# Altium PCB RasPagerC9000_smart_prototyping.PcbDoc
Units mm, origin at the board's own origin, x right, y up, seen from the top; angles counter-clockwise.
Board outline 40.39 x 44.45 mm, 2 copper layers (Top Layer, Bottom Layer); 31 components, 33 nets, 123 pads, 25 vias.
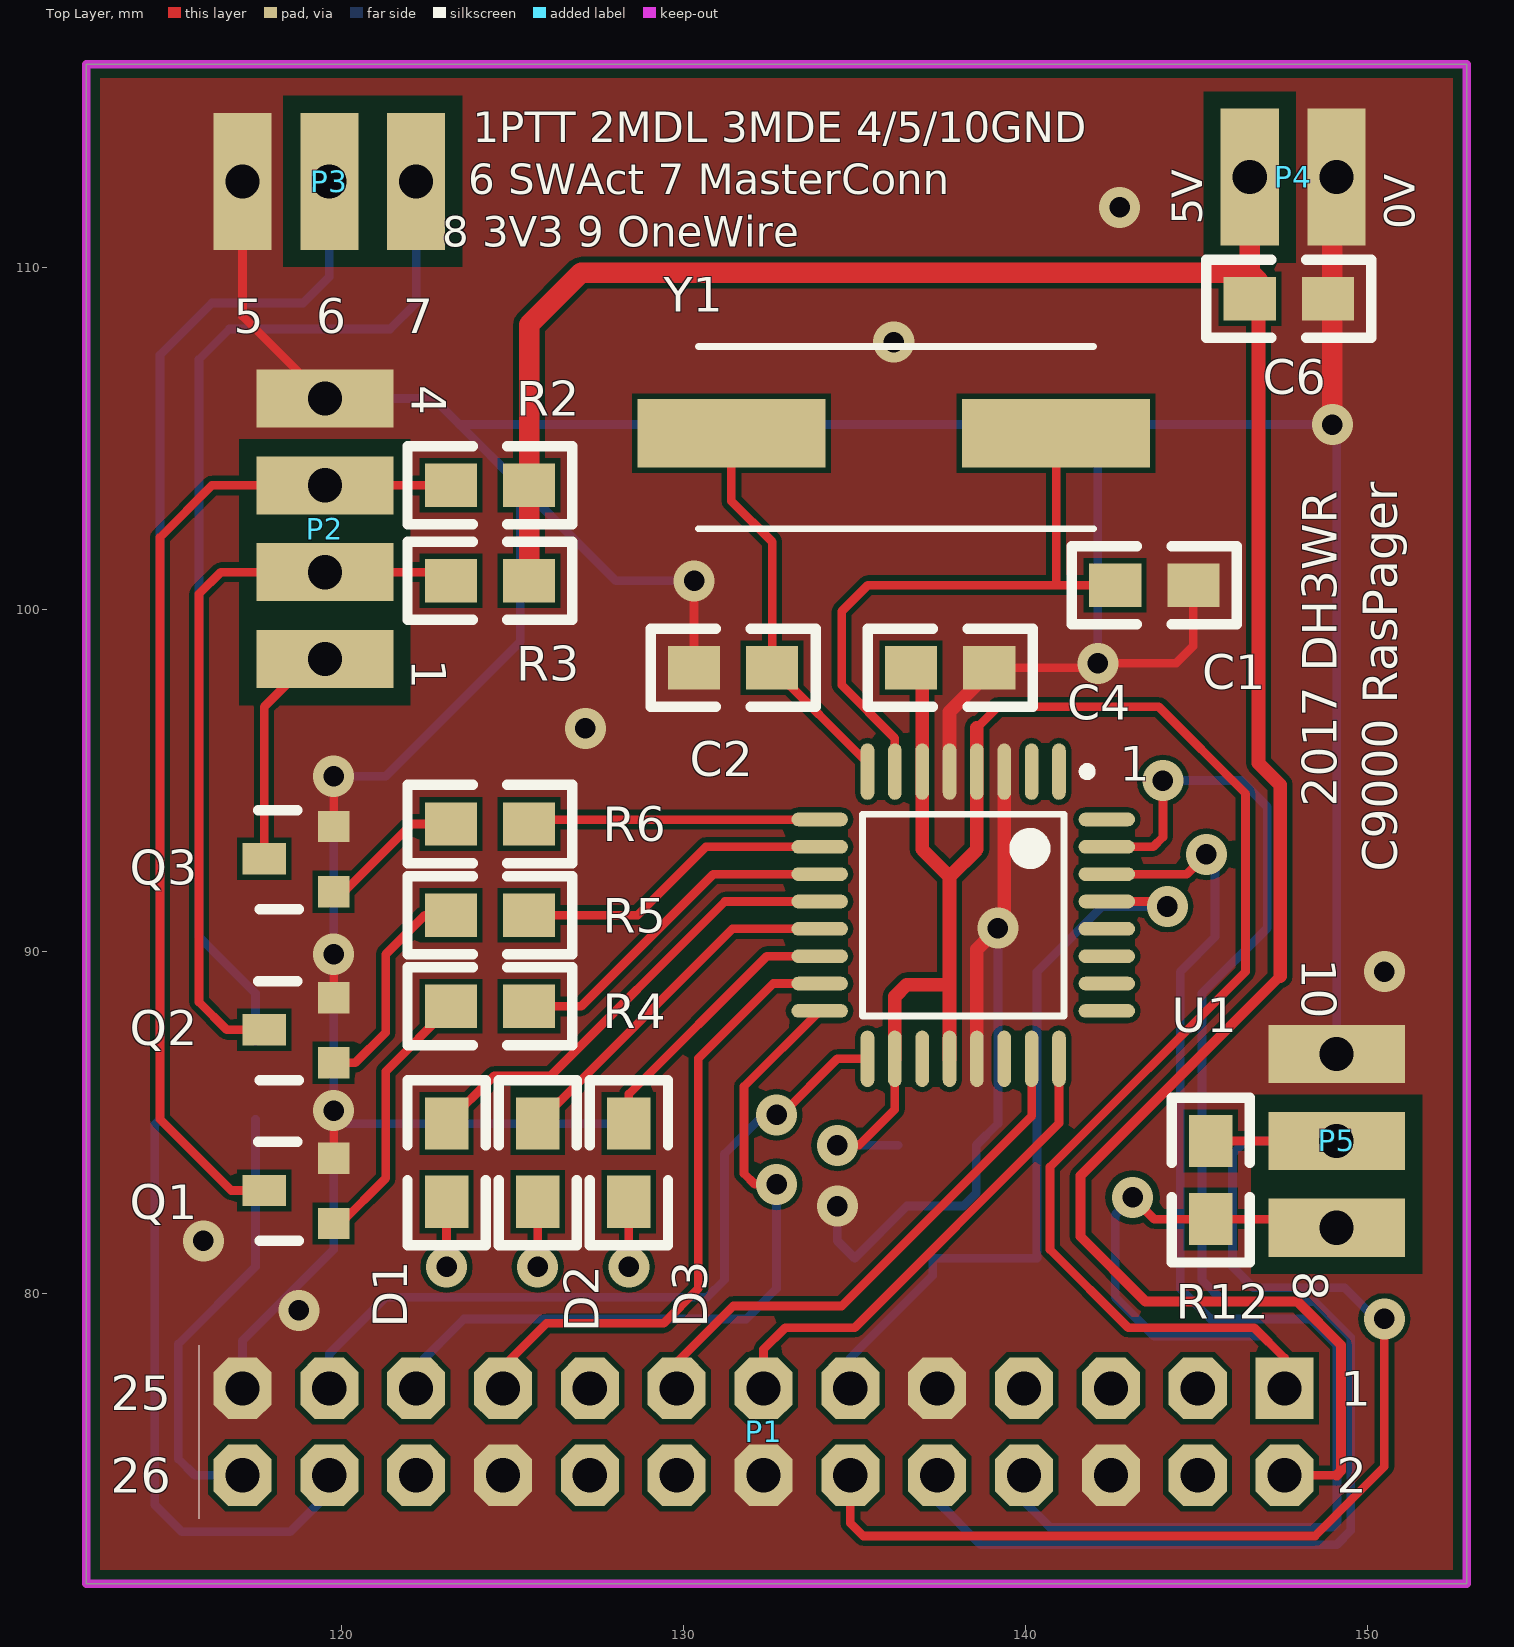
[diagram p0: Top Layer view]
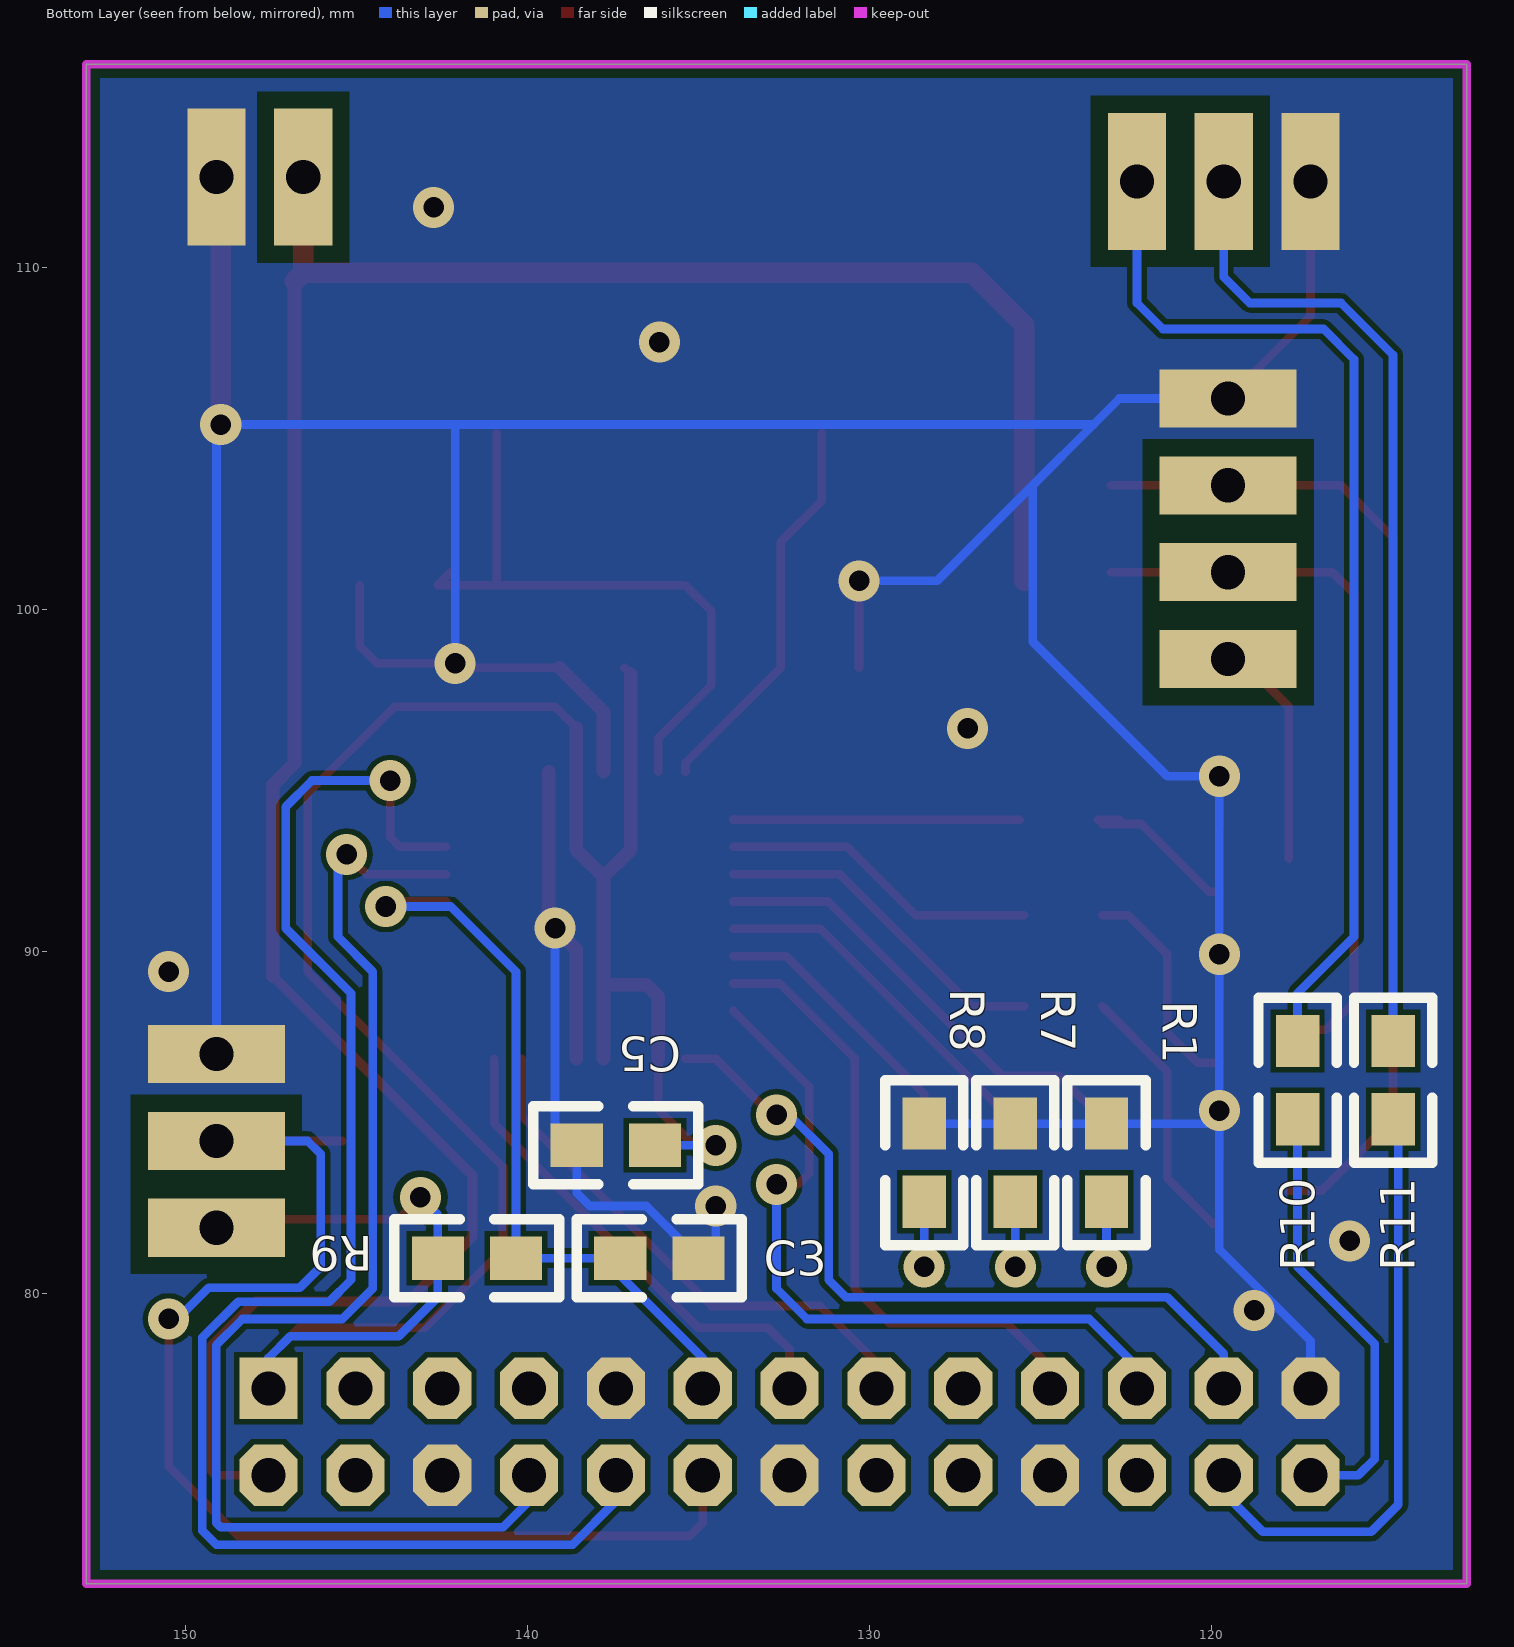
[diagram p1: Bottom Layer view, seen from below]

## Layer stack, top to bottom
Top Solder: solder mask 0.0102, Solder Resist, Dk 3.5
Top Layer: signal copper 0.0356
Dielectric 1: dielectric 0.32, FR-4, Dk 4.8
Bottom Layer: signal copper 0.0356
Bottom Solder: solder mask 0.0102, Solder Resist, Dk 3.5

## Board outline
112.522,71.501 112.522,115.951 152.908,115.951 152.908,71.501

## Design rules (kind name [scope] priority, off if disabled: settings)
BoardOutlineClearance [All] p1: gap=0.406 except(0: Arc-SplitContinuation Track-SplitContinuation SMDPad-SplitContinuation THPad-SplitContinuation Via-SplitContinuation Fill-SplitContinuation Poly-SplitContinuation Region-SplitContinuation Text-SplitContinuation)
Clearance Clearance_Loetpad [Component Like P2 Or Component Like P3 Or Component Like P4 Or Component Like P5 vs InNet('GND')] p1: gap=0.5
Clearance [All] p2: gap=0.152 except(0.305: Arc-SMDPad Arc-THPad Track-SMDPad Track-THPad SMDPad-SMDPad SMDPad-THPad THPad-THPad)
HoleSize [All] p1: absolutevalues=TRUE maxlimit=6.223 minlimit=0.305 maxpercent=80.000 minpercent=20.000
PolygonConnect [All] p1: connectstyle=Direct reliefconductorwidth=0.254 reliefentries=4 polygonreliefangle="90 Angle" airgapwidth=0.254
RoutingVias [All] p1: holewidth=6.223 width=12.446 viastyle="Through Hole" minholewidth=0.152 minwidth=0.61 maxholewidth=0.6 maxwidth=1.2
SolderMaskExpansion [All] p1: expansion=0.102
Width [All] p1: maxlimit=2 minlimit=0.152 preferedwidth=0.254 minimp=50.000000 maximp=50.000000 favimp=50.000000
29 further rules are at their usual default settings.

## Components (designator, comment, footprint, x,y, rotation, side; value= is the part's Value field where it differs from the comment)
C1 "Cap" 0805 144.907,100.711 r180 top
C2 "Cap" 0805 130.302,98.298 r0 top
C3 "Cap" 0805 135.001,81.026 r0 bottom
C4 "Cap" 0805 138.938,98.298 r180 top
C5 "Cap" 0805 138.557,84.328 r180 bottom
C6 "Cap" 0805 148.844,109.093 r180 top
D1 "TOP LED rot" 0805 123.063,84.963 r270 top
D2 "TOP LED gelb" 0805 125.73,84.963 r270 top
D3 "TOP LED grün" 0805 128.397,84.963 r270 top
P1 "GPIO RaspberryPi" HDR2X13 147.574,77.216 r180 top
P2 "C9000_Connector" HDR1X4 119.507,98.552 r90 top
P3 "Front_LED" HDR1X3 122.174,112.522 r180 top
P4 "Power 5V" HDR1X2 146.558,112.649 r0 top
P5 "OneWire" HDR1X3 149.098,81.915 r90 top
Q1 "BC847CLT1" SOT-23 119.761,82.042 r90 top
Q2 "BC847CLT1" SOT-23 119.761,86.741 r90 top
Q3 "BC847CLT1" SOT-23 119.761,91.745 r90 top
R1 "" 0805 123.063,84.963 r270 bottom
R2 "" 0805 123.19,103.632 r0 top
R3 "" 0805 123.19,100.838 r0 top
R4 "" 0805 125.476,88.392 r180 top
R5 "" 0805 125.476,91.059 r180 top
R6 "" 0805 125.476,93.726 r180 top
R7 "" 0805 125.73,84.963 r270 bottom
R8 "" 0805 128.397,84.963 r270 bottom
R9 "" 0805 140.335,81.026 r0 bottom
R10 "" 0805 117.475,85.09 r90 bottom
R11 "" 0805 114.681,87.376 r270 bottom
R12 "" 0805 145.415,84.455 r270 top
U1 "ATmega8L-8AC" 32A_N 138.176,91.059 r270 top
Y1 "8 MHz" "HC49/4H SMX" 136.144,105.156 r90 top

## Footprints (in the part's own frame and the unit in brackets; to place one, negate y for a bottom-side part, rotate by r counter-clockwise, add the part's x,y. Pads: shape width x height; smd on the part's side, far side on the other; paste and mask are expansions set on the pad)
32A_N [mm] "Thin QFP, 32-Leads, Body 7x7mm, Pitch 0.8mm, IPC Medium Density"
  oval 1.65x0.4 smd: 1(-4.2,2.8) 2(-4.2,2) 3(-4.2,1.2) 4(-4.2,0.4) 5(-4.2,-0.4) 6(-4.2,-1.2) 7(-4.2,-2) 8(-4.2,-2.8) 17(4.2,-2.8) 18(4.2,-2) 19(4.2,-1.2) 20(4.2,-0.4) 21(4.2,0.4) 22(4.2,1.2) 23(4.2,2) 24(4.2,2.8)
  oval 0.4x1.65 smd: 9(-2.8,-4.2) 10(-2,-4.2) 11(-1.2,-4.2) 12(-0.4,-4.2) 13(0.4,-4.2) 14(1.2,-4.2) 15(2,-4.2) 16(2.8,-4.2) 25(2.8,4.2) 26(2,4.2) 27(1.2,4.2) 28(0.4,4.2) 29(-0.4,4.2) 30(-1.2,4.2) 31(-2,4.2) 32(-2.8,4.2)
  silkscreen extent -4.32,-2.95 2.95,3.75, body extent -3.5,-3.5 3.5,3.5, height 1.2
0805 [mil]
  rect 60x50 smd: 1(0,0) 2(90,0)
  silkscreen extent -50,-45 140,45
"HC49/4H SMX" [mm]
  rect 2x5.5 smd: 1(0,-4.75) 2(0,4.75)
  silkscreen extent -2.79,-5.84 2.54,5.71
HDR1X2 [mm] "Connector; Header; 2 Position"
  rect 1.7x4 hole 1: 1(0,0) 2(2.54,0)
HDR1X3 [mm] "Connector; Header; 3 Position"
  rect 1.7x4 hole 1: 1(0,0) 2(2.54,0) 3(5.08,0)
HDR1X4 [mm] "Connector; Header; 4 Position"
  rect 1.7x4 hole 1: 1(0,0) 2(2.54,0) 3(5.08,0) 4(7.62,0)
HDR2X13 [mm] "Connector; Header; 13x2 Position"
  rect 1.7x1.8 hole 1: 1(0,0)
  oct 1.7x1.8 hole 1: 2(0,2.54) 3(2.54,0) 4(2.54,2.54) 5(5.08,0) 6(5.08,2.54) 7(7.62,0) 8(7.62,2.54) 9(10.16,0) 10(10.16,2.54) 11(12.7,0) 12(12.7,2.54) 13(15.24,0) 14(15.24,2.54) 15(17.78,0) 16(17.78,2.54) 17(20.32,0) 18(20.32,2.54) 19(22.86,0) 20(22.86,2.54) 21(25.4,0) 22(25.4,2.54) 23(27.94,0) 24(27.94,2.54) 25(30.48,0) 26(30.48,2.54)
  silkscreen extent 31.75,-1.27 31.75,3.81
SOT-23 [mil]
  rect 36x36 smd: 1(0,0) 2(75,0)
  rect 36x50 smd: 3(38,80)
  silkscreen extent -20,40 94,87

## Part data
C1 C2 C3 C4 C5 C6: "Capacitor"
D1 D2 D3: library part LED_2
P1: library part "Header 13X2", "Header, 13-Pin, Dual row"
P2: library part "Header 4", "Header, 4-Pin"
P3 P5: library part "Header 3", "Header, 3-Pin"
P4: library part "Header 2", "Header, 2-Pin"
Q1 Q2 Q3: "General Purpose Transistor NPN Silicon"
R1 R2 R3 R4 R5 R6 R7 R8 R9 R10 R11 R12: library part Res2, "Resistor"
U1: "8-Bit AVR Microcontroller with 8K Bytes of In-System Programmable Flash Memory"
Y1: library part XTAL, "Crystal Oscillator"

## Via types
v1: diameter 1.2, hole 0.6, Top Layer to Bottom Layer, 25 vias

## Nets (pads, with @x,y where several pads share a name; then routed paths per layer and width w, separated by ;. In a path a pad name is that pad's centre, name@x,y a point inside that pad or via, vN(x,y) a via of type N, cw(c..) or ccw(c..) an arc to the next point about the centre after c; other vN are vias at no path point)
5V: C6.2 P1.2 P4.1 R2.2 R3.2 | length 77.3
  Top Layer w0.254: P1.2 149.098,74.676
  Top Layer w0.3: 147.447,89.281 141.605,83.439 141.605,81.661 143.51,79.756 147.955,79.756 149.225,78.486 149.225,74.803 149.098,74.676
  Top Layer w0.4: C6.2@146.812,109.601 146.812,95.504 147.447,94.869 147.447,89.281
  Top Layer w0.6: R3.2 R2.2 125.476,108.331 127,109.855 146.558,109.855 ; P4.1 146.558,109.855 ; C6.2@146.812,109.601 146.558,109.855
GND: C1.1 C2.1 C3.1 C4.1 C5.1 C6.1 P1.6 P1.9 P1.14 P1.20 P1.25 P2.4 P3.3 P4.2 P5.3 Q1.2 Q2.2 Q3.2 R1.1 R7.1 R8.1 U1.3 U1.5 U1.21 | length 160
  Top Layer w0.254: P3.3@116.561,112.522 P3.3 117.094,108.585 P2.4 ; Q1.2 v1(119.761,85.344) ; Q2.2 v1(119.761,89.916) ; Q3.2 v1(119.761,95.123) ; C2.1 v1(130.302,100.838) ; C4.1 139.065,98.298 141.986,98.298 v1(142.113,98.425) 144.399,98.425 144.907,98.933 C1.1 ; v1(139.192,90.678) v1@139.376,90.862
  Top Layer w0.4: P1.9@137.16,77.216 P1.9 ; U1.5 137.776,97.009 C4.1@139.065,98.298 ; U1.21 138.576,90.062 v1(139.192,90.678) ; v1@139.376,90.862 U1.3
  Top Layer w0.6: v1(148.971,105.41) 148.971,112.522 P4.2
  Bottom Layer w0.254: P1.25 117.094,78.613 119.761,81.28 v1(119.761,85.344) ; P2.4 122.682,106.172 123.444,105.41 ; R8.1 R7.1 R1.1 120.142,84.963 v1(119.761,85.344) ; v1(130.302,100.838) 128.016,100.838 125.222,103.632 ; v1(134.493,82.55) 134.493,81.534 C3.1 136.525,82.55 138.176,82.55 138.557,82.931 C5.1 139.192,84.963 v1(139.192,90.678) ; v1(142.113,98.425) 142.113,105.41 ; P5.3 149.098,105.283 v1(148.971,105.41) 142.113,105.41 ; v1(119.761,85.344) v1(119.761,89.916) v1(119.761,95.123) 121.285,95.123 125.222,99.06 125.222,103.632 ; 123.444,105.41 142.113,105.41 ; 123.444,105.41 125.222,103.632
  other v1: 118.745,79.502 150.495,89.408 127.127,96.52 136.144,107.823 142.748,111.76
LED_GELB: D2.1 U1.13 | length 11.7
  Top Layer w0.254: D2.1@125.603,84.455 D2.1@125.603,85.09 ; D2.1@125.73,85.217 D2.1 131.426,90.659 U1.13
  Top Layer w0.4: D2.1@125.603,85.09 D2.1@125.73,85.217
LED_GRüN: D3.1 U1.14 | length 8.1
  Top Layer w0.254: D3.1 128.397,85.828 132.428,89.859 U1.14
LED_MASTER_CONN: P1.26 R10.1 | length 12.9
  Bottom Layer w0.254: P1.26 115.697,74.676 115.22,75.153 115.22,78.517 117.475,80.772 R10.1
LED_ROT: D1.1 U1.12 | length 13.6
  Top Layer w0.254: D1.1 124.46,86.36 126.111,86.36 131.21,91.459 U1.12
LED_SW_ACTIVE: P1.24 R11.2 | length 17.8
  Bottom Layer w0.254: R11.2 114.529,84.938 114.529,73.812 115.316,73.025 118.491,73.025 119.634,74.168 P1.24
MDE_ATMEGA: R4.1 U1.11 | length 10.1
  Top Layer w0.254: R4.1 127,88.392 130.867,92.259 U1.11
MDE_C9000: P2.3 Q1.3 R2.1 | length 29.7
  Top Layer w0.254: Q1.3 116.764,83.007 114.681,85.09 114.681,102.108 116.205,103.632 P2.3 ; P2.3@120.269,103.632 R2.1@122.936,103.632
  Top Layer w0.4: P2.3 P2.3@120.142,103.632
MDL_ATMEGA: R5.1 U1.10 | length 9.3
  Top Layer w0.254: R5.1 128.651,91.059 130.651,93.059 U1.10
MDL_C9000: P2.2 Q2.3 R3.1 | length 21.6
  Top Layer w0.254: Q2.3 116.637,87.706 115.824,88.519 115.824,100.457 116.459,101.092 P2.2@119.126,101.092 ; P2.2 R3.1@122.936,101.092
  Top Layer w0.7: P2.2@119.126,101.092 P2.2
MISO: P1.21 U1.16 | length 21.9
  Top Layer w0.254: v1(132.715,83.185) 132.08,83.185 131.762,83.502 131.762,86.045 U1.16
  Bottom Layer w0.254: P1.21 122.174,77.851 123.571,79.248 131.826,79.248 132.715,80.137 v1(132.715,83.185)
MOSI: P1.19 U1.15 | length 18.5
  Top Layer w0.254: P1.19 124.714,77.851 125.984,79.121 129.413,79.121 130.429,80.137 130.429,86.868 132.62,89.059 U1.15
NetC1_2: C1.2 U1.7 Y1.1 | length 18.7
  Top Layer w0.254: U1.7 136.176,96.234 134.62,97.79 134.62,99.949 135.382,100.711 140.843,100.711 ; Y1.1 140.894,100.762 140.843,100.711 ; C1.2@142.24,101.092 C1.2 140.843,100.711
NetC2_2: C2.2 U1.8 Y1.2 | length 11.5
  Top Layer w0.254: Y1.2 131.394,103.175 132.588,101.981 C2.2 135.376,95.51 U1.8
NetD1_2: D1.2 R1.2 | length 3.8
  Top Layer w0.254: v1(123.063,80.772) D1.2
  Bottom Layer w0.254: v1(123.063,80.772) R1.2
NetD2_2: D2.2 R7.2 | length 3.8
  Top Layer w0.254: v1(125.73,80.772) D2.2
  Bottom Layer w0.254: v1(125.73,80.772) R7.2
NetD3_2: D3.2 R8.2 | length 3.8
  Top Layer w0.254: v1(128.397,80.772) D3.2
  Bottom Layer w0.254: v1(128.397,80.772) R8.2
NetP3_1: P3.1 R10.2 | length 31.4
  Top Layer w0.254: P3.1 P3.1@122.301,112.395
  Bottom Layer w0.254: R10.2 117.475,88.773 115.824,90.424 115.824,107.315 116.713,108.204 121.412,108.204 122.174,108.966 P3.1
NetP3_2: P3.2 R11.1 | length 28.8
  Bottom Layer w0.254: R11.1 114.681,107.442 116.205,108.966 118.872,108.966 119.634,109.728 P3.2
NetQ1_1: Q1.1 R4.2 | length 7.9
  Top Layer w0.254: Q1.1 119.964,82.042 121.285,83.363 121.285,86.487 R4.2
NetQ2_1: Q2.1 R5.2 | length 6.6
  Top Layer w0.254: Q2.1 120.396,86.741 121.285,87.63 121.285,89.916 122.428,91.059 R5.2
NetQ3_1: Q3.1 R6.2 | length 4.9
  Top Layer w0.254: Q3.1 120.066,91.745 122.047,93.726 R6.2 ; R6.2@122.682,93.853 R6.2@123.317,93.853
ONEWIRE: P1.12 P5.2 R12.1 | length 37.6
  Top Layer w0.254: P1.12 134.874,73.279 135.255,72.898 148.463,72.898 150.495,74.93 v1(150.495,79.248) ; R12.1 P5.2
  Bottom Layer w0.254: P5.2 146.431,84.455 146.05,84.074 146.05,80.772 146.66,80.162 149.327,80.162 150.241,79.248 v1(150.495,79.248)
PTT_ATMEGA: R6.1 U1.9 | length 8.4
  Top Layer w0.254: R6.1@125.603,93.853 133.97,93.853 U1.9
PTT_C9000: P2.1 Q3.3 | length 6.4
  Top Layer w0.254: Q3.3 117.729,97.155 P2.1@119.126,98.552
PTT_RASPI: P1.13 U1.24 | length 14.4
  Top Layer w0.254: P1.13 132.334,78.359 132.969,78.994 135.001,78.994 140.976,84.969 U1.24
RST: C3.2 P1.11 R9.1 U1.29 | length 22.5
  Top Layer w0.254: U1.29 v1@143.872,91.459
  Bottom Layer w0.254: P1.11@135.001,77.343 P1.11 134.874,78.105 137.287,80.518 C3.2 R9.1 140.335,89.408 142.24,91.313 v1(144.145,91.313)
RX_UART: P1.8 U1.30 | length 37.2
  Top Layer w0.254: U1.30 144.71,92.259 v1(145.288,92.837)
  Top Layer w0.4: P1.8@139.827,74.676 P1.8
  Bottom Layer w0.254: P1.8 139.954,73.914 140.716,73.152 148.971,73.152 149.108,73.289 149.108,78.476 148.336,79.248 145.415,79.248 144.526,80.137 144.526,89.408 145.542,90.424 145.542,92.583 v1(145.288,92.837)
SCLK: P1.23 U1.17 | length 22.5
  Top Layer w0.254: v1@132.833,85.217 132.851,85.217 134.493,86.859 U1.17
  Bottom Layer w0.254: P1.23 119.634,78.232 121.285,79.883 130.683,79.883 131.191,80.391 131.191,84.074 132.334,85.217 v1(132.715,85.217) v1@132.833,85.217
SENDDATA: P1.15 U1.23 | length 15.8
  Top Layer w0.254: P1.15 129.794,77.978 131.445,79.629 134.62,79.629 140.176,85.185 U1.23
TX_UART: P1.10 U1.31 | length 45.7
  Top Layer w0.254: U1.31 143.732,93.059 144.018,93.345 v1(144.018,94.996)
  Bottom Layer w0.254: P1.10 137.414,73.914 138.684,72.644 149.098,72.644 149.514,73.06 149.514,78.705 148.463,79.756 145.796,79.756 145.161,80.391 145.161,88.773 147.066,90.678 147.066,94.234 146.304,94.996 v1(144.018,94.996)
VCC: C4.2 C5.2 P1.1 P5.1 R9.2 R12.2 U1.4 U1.6 U1.18 U1.20 | length 75.4
  Top Layer w0.254: v1(134.493,84.328) 135.128,84.328 136.176,85.376 U1.18 ; C4.2@136.976,98.114 C4.2@137.16,98.298 ; 138.576,96.539 139.192,97.155 143.891,97.155 146.431,94.615 146.431,89.408 140.716,83.693 140.716,81.28 143.002,78.994 146.685,78.994 147.574,78.105 P1.1 ; v1(143.129,82.804) 143.764,82.169 R12.2 148.844,82.169 P5.1
  Top Layer w0.4: U1.18 136.176,88.678 136.525,89.027 137.776,89.027 ; C4.2@136.976,98.114 U1.6 136.976,92.983 137.776,92.183 ; U1.20 137.776,89.027 ; 138.576,96.539 U1.4 138.576,92.983 137.776,92.183 ; 137.776,89.027 137.776,92.183
  Bottom Layer w0.254: v1(134.493,84.328) C5.2 ; v1(143.129,82.804) 142.621,82.296 R9.2 142.621,79.883 143.764,78.74 146.939,78.74 147.574,78.105 P1.1
pads on no net: P1.3 P1.4 P1.5 P1.7 P1.16 P1.17 P1.18 P1.22 U1.1 U1.2 U1.19 U1.22 U1.25 U1.26 U1.27 U1.28 U1.32
copper on no net:
  other v1: 115.951,81.534

## Polygon pours and split planes (outlines as drawn)
GND on Top Layer "Bottom Layer-GND" (solid, remove dead copper, pour order 8): 112.522,115.951 152.908,115.951 152.908,71.501 112.522,71.501
GND on Bottom Layer "Bottom Layer-GND" (solid, remove dead copper, pour order 10): 112.522,115.951 152.908,115.951 152.908,71.501 112.522,71.501

## Keep-outs
Keep-Out Layer:
  the board outline again, w0.254

## Silkscreen, mask and mechanical layers (free items; w line width, h text height)
Top Overlay:
  text "1PTT 2MDL 3MDE 4/5/10GND" at 123.825,113.665 h0.9
  text "6 SWAct 7 MasterConn" at 123.698,112.141 h0.9
  text "5V" at 145.161,111.252 h0.9 r90
  text "0V" at 151.384,111.125 h0.9 r90
  text "8 3V3 9 OneWire" at 122.936,110.617 h0.9
  text "5" at 116.84,108.077 h1
  text "6" at 119.253,108.077 h1
  text "7" at 121.793,108.077 h1
  text "4" at 122.047,106.553 h1 r270
  text "1" at 122.047,98.552 h1 r270
  text "1" at 142.748,94.996 h1
  text "2017 DH3WR" at 149.098,94.234 h1 r90
  text "C9000 RasPager" at 150.876,92.329 h1 r90
  text "10" at 148.082,89.789 h1 r270
  text "8" at 147.828,80.645 h1 r270

## Text inside footprints (layer, text, board x,y; h text height)
P1: Top Overlay "26" at 113.238,74.168 h1.02; Top Overlay "1" at 149.225,76.708 h1.02; Top Overlay "2" at 149.098,74.168 h1.02; Top Overlay "25" at 113.238,76.581 h1.02